# Altium PCB CH569W-R0-1v0.PcbDoc (part 2 of 4)
Units mil, origin at the board's own origin, x right, y up, seen from the top; angles counter-clockwise.
Board outline 3674 x 3156.46 mil, 4 copper layers (Top Layer, Mid-Layer 1, Mid-Layer 2, Bottom Layer); 78 components, 99 nets, 392 pads, 683 vias.
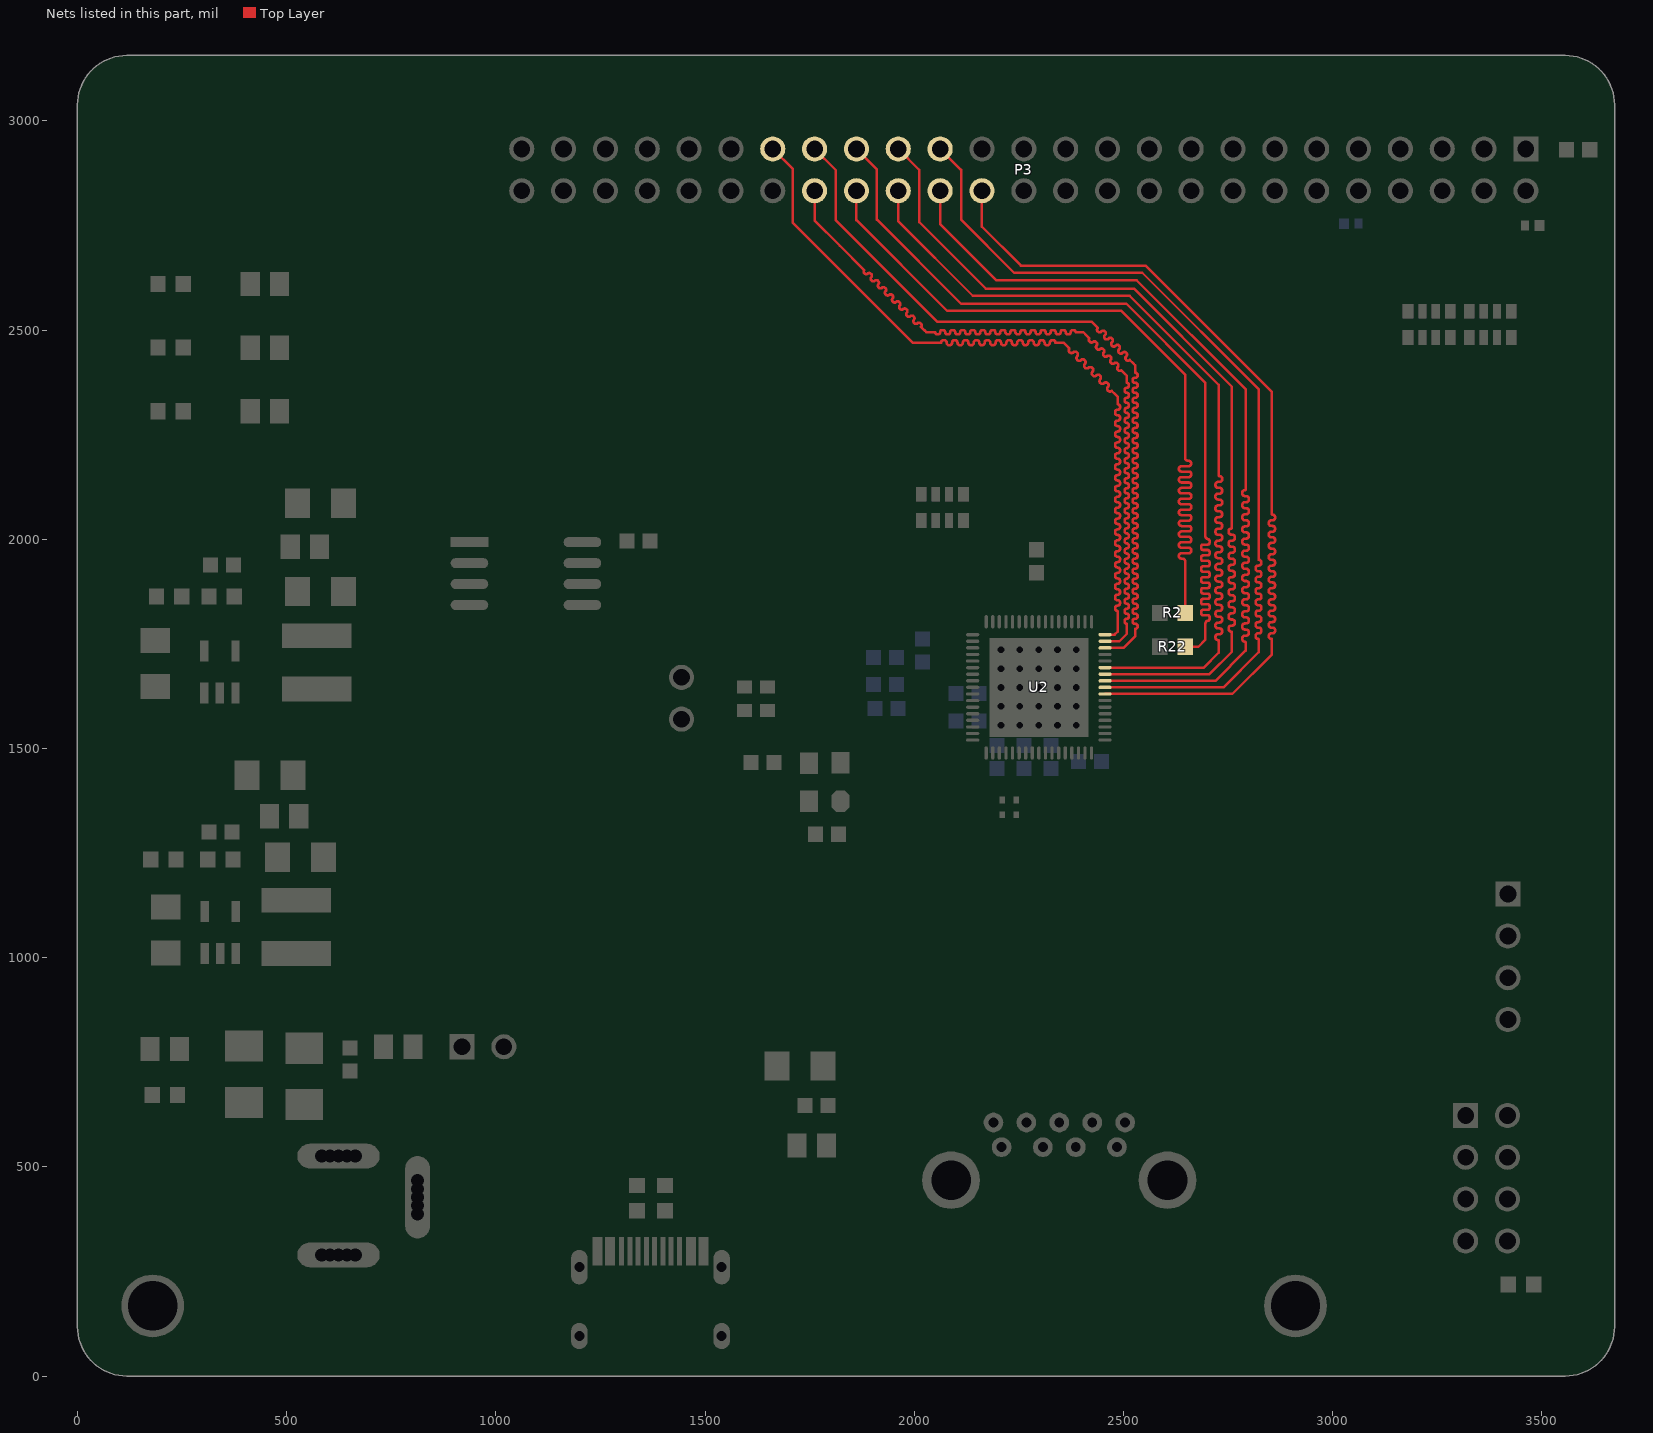
[diagram p4: the nets of this part, all layers, seen from the top]

## Via types
v1: diameter 17.72, hole 7.87, Top Layer to Bottom Layer, tented both sides, 350 vias
v2: diameter 28, hole 15, Top Layer to Bottom Layer, tented both sides, 141 vias
v3: diameter 28, hole 16, Top Layer to Bottom Layer, tented both sides, 104 vias
v4: diameter 24, hole 12, Top Layer to Bottom Layer, tented both sides, 85 vias
v5: diameter 30, hole 18, Top Layer to Bottom Layer, tented both sides, 3 vias

## Nets (pads, with @x,y where several pads share a name; then routed paths per layer and width w, separated by ;. In a path a pad name is that pad's centre, name@x,y a point inside that pad or via, vN(x,y) a via of type N, cw(c..) or ccw(c..) an arc to the next point about the centre after c; other vN are vias at no path point) (continued)
HD9: P3.28 U2.25 | length 2221.7
  Top Layer w6: P3.28@2162,2833 2162,2747 2255,2654 2553,2654 2855,2352 2855,2060.18 ccw(c2856.43,2060.18) 2856.43,2058.75 cw(c2856.43,2052.68) 2862.5,2052.68 2862.5,2051.32 cw(c2856.43,2051.32) 2856.43,2045.25 2855,2045.25 2853.57,2045.25 ccw(c2853.57,2039.18) 2847.5,2039.18 2847.5,2037.82 ccw(c2853.57,2037.82) 2853.57,2031.75 2855,2031.75 2856.43,2031.75 cw(c2856.43,2025.68) 2862.5,2025.68 2862.5,2024.32 cw(c2856.43,2024.32) 2856.43,2018.25 2855,2018.25 2853.57,2018.25 ccw(c2853.57,2012.18) 2847.5,2012.18 2847.5,2010.82 ccw(c2853.57,2010.82) 2853.57,2004.75 2855,2004.75 2856.43,2004.75 cw(c2856.43,1998.68) 2862.5,1998.68 2862.5,1997.32 cw(c2856.43,1997.32) 2856.43,1991.25 2855,1991.25 2853.57,1991.25 ccw(c2853.57,1985.18) 2847.5,1985.18 2847.5,1983.82 ccw(c2853.57,1983.82) 2853.57,1977.75 2855,1977.75 2856.43,1977.75 cw(c2856.43,1971.68) 2862.5,1971.68 2862.5,1970.32 cw(c2856.43,1970.32) 2856.43,1964.25 2855,1964.25 2853.57,1964.25 ccw(c2853.57,1958.18) 2847.5,1958.18 2847.5,1956.82 ccw(c2853.57,1956.82) 2853.57,1950.75 2855,1950.75 2856.43,1950.75 cw(c2856.43,1944.68) 2862.5,1944.68 2862.5,1943.32 cw(c2856.43,1943.32) 2856.43,1937.25 2855,1937.25 2853.57,1937.25 ccw(c2853.57,1931.18) 2847.5,1931.18 2847.5,1929.82 ccw(c2853.57,1929.82) 2853.57,1923.75 2855,1923.75 2856.43,1923.75 cw(c2856.43,1917.68) 2862.5,1917.68 2862.5,1916.32 cw(c2856.43,1916.32) 2856.43,1910.25 2855,1910.25 2853.57,1910.25 ccw(c2853.57,1904.18) 2847.5,1904.18 2847.5,1902.82 ccw(c2853.57,1902.82) 2853.57,1896.75 2855,1896.75 2856.43,1896.75 cw(c2856.43,1890.68) 2862.5,1890.68 2862.5,1889.32 cw(c2856.43,1889.32) 2856.43,1883.25 2855,1883.25 2853.57,1883.25 ccw(c2853.57,1877.18) 2847.5,1877.18 2847.5,1875.82 ccw(c2853.57,1875.82) 2853.57,1869.75 2855,1869.75 2856.43,1869.75 cw(c2856.43,1863.68) 2862.5,1863.68 2862.5,1862.32 cw(c2856.43,1862.32) 2856.43,1856.25 2855,1856.25 2853.57,1856.25 ccw(c2853.57,1850.18) 2847.5,1850.18 2847.5,1848.82 ccw(c2853.57,1848.82) 2853.57,1842.75 2855,1842.75 2856.43,1842.75 cw(c2856.43,1836.68) 2862.5,1836.68 2862.5,1835.32 cw(c2856.43,1835.32) 2856.43,1829.25 2855,1829.25 2853.57,1829.25 ccw(c2853.57,1823.18) 2847.5,1823.18 2847.5,1821.82 ccw(c2853.57,1821.82) 2853.57,1815.75 2855,1815.75 2856.43,1815.75 cw(c2856.43,1809.68) 2862.5,1809.68 2862.5,1808.32 cw(c2856.43,1808.32) 2856.43,1802.25 2855,1802.25 2853.57,1802.25 ccw(c2853.57,1796.18) 2847.5,1796.18 2847.5,1794.82 ccw(c2853.57,1794.82) 2853.57,1788.75 2855,1788.75 2856.43,1788.75 cw(c2856.43,1782.68) 2862.5,1782.68 2862.5,1781.32 cw(c2856.43,1781.32) 2856.43,1775.25 2855,1775.25 2853.57,1775.25 ccw(c2853.57,1769.18) 2847.5,1769.18 2847.5,1767.82 ccw(c2853.57,1767.82) 2853.57,1761.75 cw(c2853.57,1760.32) 2855,1760.32 2855,1755 2855,1725 2760.25,1630.25 U2.25@2456.18,1630.25
HD10: P3.29 U2.26 | length 2221.3
  Top Layer w6: P3.29@2062,2933 2112,2883 2112,2764 2239,2637 2545,2637 2823,2359 2823,2334 2823,1951.68 ccw(c2823.93,1951.68) 2823.93,1950.75 cw(c2823.93,1944.68) 2830,1944.68 2830,1943.32 cw(c2823.93,1943.32) 2823.93,1937.25 2823,1937.25 2822.07,1937.25 ccw(c2822.07,1931.18) 2816,1931.18 2816,1929.82 ccw(c2822.07,1929.82) 2822.07,1923.75 2823,1923.75 2823.93,1923.75 cw(c2823.93,1917.68) 2830,1917.68 2830,1916.32 cw(c2823.93,1916.32) 2823.93,1910.25 2823,1910.25 2822.07,1910.25 ccw(c2822.07,1904.18) 2816,1904.18 2816,1902.82 ccw(c2822.07,1902.82) 2822.07,1896.75 2823,1896.75 2823.93,1896.75 cw(c2823.93,1890.68) 2830,1890.68 2830,1889.32 cw(c2823.93,1889.32) 2823.93,1883.25 2823,1883.25 2822.07,1883.25 ccw(c2822.07,1877.18) 2816,1877.18 2816,1875.82 ccw(c2822.07,1875.82) 2822.07,1869.75 2823,1869.75 2823.93,1869.75 cw(c2823.93,1863.68) 2830,1863.68 2830,1862.32 cw(c2823.93,1862.32) 2823.93,1856.25 2823,1856.25 2822.07,1856.25 ccw(c2822.07,1850.18) 2816,1850.18 2816,1848.82 ccw(c2822.07,1848.82) 2822.07,1842.75 2823,1842.75 2823.93,1842.75 cw(c2823.93,1836.68) 2830,1836.68 2830,1835.32 cw(c2823.93,1835.32) 2823.93,1829.25 2823,1829.25 2822.07,1829.25 ccw(c2822.07,1823.18) 2816,1823.18 2816,1821.82 ccw(c2822.07,1821.82) 2822.07,1815.75 2823,1815.75 2823.93,1815.75 cw(c2823.93,1809.68) 2830,1809.68 2830,1808.32 cw(c2823.93,1808.32) 2823.93,1802.25 2823,1802.25 2822.07,1802.25 ccw(c2822.07,1796.18) 2816,1796.18 2816,1794.82 ccw(c2822.07,1794.82) 2822.07,1788.75 2823,1788.75 2823.93,1788.75 cw(c2823.93,1782.68) 2830,1782.68 2830,1781.32 cw(c2823.93,1781.32) 2823.93,1775.25 2823,1775.25 2822.07,1775.25 ccw(c2822.07,1769.18) 2816,1769.18 2816,1767.82 ccw(c2822.07,1767.82) 2822.07,1761.75 cw(c2822.07,1760.82) 2823,1760.82 2823,1755 2823,1730 2739,1646 U2.26@2456.18,1646
HD11: P3.30 U2.27 | length 2222.1
  Top Layer w6: P3.30@2062,2833 2062,2754 2197,2619 2532,2619 2792,2359 2792,2119.22 cw(c2790.52,2119.22) 2790.52,2117.75 ccw(c2790.52,2111.22) 2784,2111.22 2784,2109.78 ccw(c2790.52,2109.78) 2790.52,2103.25 2792,2103.25 2793.48,2103.25 cw(c2793.48,2096.72) 2800,2096.72 2800,2095.28 cw(c2793.48,2095.28) 2793.48,2088.75 2792,2088.75 2790.52,2088.75 ccw(c2790.52,2082.22) 2784,2082.22 2784,2080.78 ccw(c2790.52,2080.78) 2790.52,2074.25 2792,2074.25 2793.48,2074.25 cw(c2793.48,2067.72) 2800,2067.72 2800,2066.28 cw(c2793.48,2066.28) 2793.48,2059.75 2792,2059.75 2790.52,2059.75 ccw(c2790.52,2053.22) 2784,2053.22 2784,2051.78 ccw(c2790.52,2051.78) 2790.52,2045.25 2792,2045.25 2793.48,2045.25 cw(c2793.48,2038.72) 2800,2038.72 2800,2037.28 cw(c2793.48,2037.28) 2793.48,2030.75 2792,2030.75 2790.52,2030.75 ccw(c2790.52,2024.22) 2784,2024.22 2784,2022.78 ccw(c2790.52,2022.78) 2790.52,2016.25 2792,2016.25 2793.48,2016.25 cw(c2793.48,2009.72) 2800,2009.72 2800,2008.28 cw(c2793.48,2008.28) 2793.48,2001.75 2792,2001.75 2790.52,2001.75 ccw(c2790.52,1995.22) 2784,1995.22 2784,1993.78 ccw(c2790.52,1993.78) 2790.52,1987.25 2792,1987.25 2793.48,1987.25 cw(c2793.48,1980.72) 2800,1980.72 2800,1979.28 cw(c2793.48,1979.28) 2793.48,1972.75 2792,1972.75 2790.52,1972.75 ccw(c2790.52,1966.22) 2784,1966.22 2784,1964.78 ccw(c2790.52,1964.78) 2790.52,1958.25 2792,1958.25 2793.48,1958.25 cw(c2793.48,1951.72) 2800,1951.72 2800,1950.28 cw(c2793.48,1950.28) 2793.48,1943.75 2792,1943.75 2790.52,1943.75 ccw(c2790.52,1937.22) 2784,1937.22 2784,1935.78 ccw(c2790.52,1935.78) 2790.52,1929.25 2792,1929.25 2793.48,1929.25 cw(c2793.48,1922.72) 2800,1922.72 2800,1921.28 cw(c2793.48,1921.28) 2793.48,1914.75 2792,1914.75 2790.52,1914.75 ccw(c2790.52,1908.22) 2784,1908.22 2784,1906.78 ccw(c2790.52,1906.78) 2790.52,1900.25 2792,1900.25 2793.48,1900.25 cw(c2793.48,1893.72) 2800,1893.72 2800,1892.28 cw(c2793.48,1892.28) 2793.48,1885.75 2792,1885.75 2790.52,1885.75 ccw(c2790.52,1879.22) 2784,1879.22 2784,1877.78 ccw(c2790.52,1877.78) 2790.52,1871.25 2792,1871.25 2793.48,1871.25 cw(c2793.48,1864.72) 2800,1864.72 2800,1863.28 cw(c2793.48,1863.28) 2793.48,1856.75 2792,1856.75 2790.52,1856.75 ccw(c2790.52,1850.22) 2784,1850.22 2784,1848.78 ccw(c2790.52,1848.78) 2790.52,1842.25 2792,1842.25 2793.48,1842.25 cw(c2793.48,1835.72) 2800,1835.72 2800,1834.28 cw(c2793.48,1834.28) 2793.48,1827.75 2792,1827.75 2790.52,1827.75 ccw(c2790.52,1821.22) 2784,1821.22 2784,1819.78 ccw(c2790.52,1819.78) 2790.52,1813.25 2792,1813.25 2793.48,1813.25 cw(c2793.48,1806.72) 2800,1806.72 2800,1805.28 cw(c2793.48,1805.28) 2793.48,1798.75 2792,1798.75 2790.52,1798.75 ccw(c2790.52,1792.22) 2784,1792.22 2784,1790.78 ccw(c2790.52,1790.78) 2790.52,1784.25 2792,1784.25 2793.48,1784.25 cw(c2793.48,1777.72) 2800,1777.72 2800,1776.28 cw(c2793.48,1776.28) 2793.48,1769.75 2792,1769.75 2790.52,1769.75 ccw(c2790.52,1763.22) 2784,1763.22 2784,1761.78 ccw(c2790.52,1761.78) 2790.52,1755.25 cw(c2790.52,1753.78) 2792,1753.78 2792,1748 2792,1734 2719.75,1661.75 U2.27@2456.18,1661.75
HD12: P3.31 U2.28 | length 2223.4
  Top Layer w6: P3.31@1962,2933 2012,2883 2012,2758 2171,2599 2525,2599 2759,2365 2759,2350 2759,2026.72 cw(c2758.02,2026.72) 2758.02,2025.75 ccw(c2758.02,2019.22) 2751.5,2019.22 2751.5,2017.78 ccw(c2758.02,2017.78) 2758.02,2011.25 2759,2011.25 2759.98,2011.25 cw(c2759.98,2004.72) 2766.5,2004.72 2766.5,2003.28 cw(c2759.98,2003.28) 2759.98,1996.75 2759,1996.75 2758.02,1996.75 ccw(c2758.02,1990.22) 2751.5,1990.22 2751.5,1988.78 ccw(c2758.02,1988.78) 2758.02,1982.25 2759,1982.25 2759.98,1982.25 cw(c2759.98,1975.72) 2766.5,1975.72 2766.5,1974.28 cw(c2759.98,1974.28) 2759.98,1967.75 2759,1967.75 2758.02,1967.75 ccw(c2758.02,1961.22) 2751.5,1961.22 2751.5,1959.78 ccw(c2758.02,1959.78) 2758.02,1953.25 2759,1953.25 2759.98,1953.25 cw(c2759.98,1946.72) 2766.5,1946.72 2766.5,1945.28 cw(c2759.98,1945.28) 2759.98,1938.75 2759,1938.75 2758.02,1938.75 ccw(c2758.02,1932.22) 2751.5,1932.22 2751.5,1930.78 ccw(c2758.02,1930.78) 2758.02,1924.25 2759,1924.25 2759.98,1924.25 cw(c2759.98,1917.72) 2766.5,1917.72 2766.5,1916.28 cw(c2759.98,1916.28) 2759.98,1909.75 2759,1909.75 2758.02,1909.75 ccw(c2758.02,1903.22) 2751.5,1903.22 2751.5,1901.78 ccw(c2758.02,1901.78) 2758.02,1895.25 2759,1895.25 2759.98,1895.25 cw(c2759.98,1888.72) 2766.5,1888.72 2766.5,1887.28 cw(c2759.98,1887.28) 2759.98,1880.75 2759,1880.75 2758.02,1880.75 ccw(c2758.02,1874.22) 2751.5,1874.22 2751.5,1872.78 ccw(c2758.02,1872.78) 2758.02,1866.25 2759,1866.25 2759.98,1866.25 cw(c2759.98,1859.72) 2766.5,1859.72 2766.5,1858.28 cw(c2759.98,1858.28) 2759.98,1851.75 2759,1851.75 2758.02,1851.75 ccw(c2758.02,1845.22) 2751.5,1845.22 2751.5,1843.78 ccw(c2758.02,1843.78) 2758.02,1837.25 2759,1837.25 2759.98,1837.25 cw(c2759.98,1830.72) 2766.5,1830.72 2766.5,1829.28 cw(c2759.98,1829.28) 2759.98,1822.75 2759,1822.75 2758.02,1822.75 ccw(c2758.02,1816.22) 2751.5,1816.22 2751.5,1814.78 ccw(c2758.02,1814.78) 2758.02,1808.25 2759,1808.25 2759.98,1808.25 cw(c2759.98,1801.72) 2766.5,1801.72 2766.5,1800.28 cw(c2759.98,1800.28) 2759.98,1793.75 2759,1793.75 2758.02,1793.75 ccw(c2758.02,1787.22) 2751.5,1787.22 2751.5,1785.78 ccw(c2758.02,1785.78) 2758.02,1779.25 cw(c2758.02,1778.28) 2759,1778.28 2759,1772 2759,1731 2705.5,1677.5 U2.28@2456.18,1677.5
HD13: P3.32 U2.29 | length 2222.7
  Top Layer w6: P3.32@1962,2833 1962,2760 2140,2582 2515,2582 2728,2369 2728,2351 2728,2152.7 ccw(c2729.7,2152.7) 2729.7,2151 cw(c2729.7,2144.7) 2736,2144.7 2736,2143.3 cw(c2729.7,2143.3) 2729.7,2137 2728,2137 2726.3,2137 ccw(c2726.3,2130.7) 2720,2130.7 2720,2129.3 ccw(c2726.3,2129.3) 2726.3,2123 2728,2123 2729.7,2123 cw(c2729.7,2116.7) 2736,2116.7 2736,2115.3 cw(c2729.7,2115.3) 2729.7,2109 2728,2109 2726.3,2109 ccw(c2726.3,2102.7) 2720,2102.7 2720,2101.3 ccw(c2726.3,2101.3) 2726.3,2095 2728,2095 2729.7,2095 cw(c2729.7,2088.7) 2736,2088.7 2736,2087.3 cw(c2729.7,2087.3) 2729.7,2081 2728,2081 2726.3,2081 ccw(c2726.3,2074.7) 2720,2074.7 2720,2073.3 ccw(c2726.3,2073.3) 2726.3,2067 2728,2067 2729.7,2067 cw(c2729.7,2060.7) 2736,2060.7 2736,2059.3 cw(c2729.7,2059.3) 2729.7,2053 2728,2053 2726.3,2053 ccw(c2726.3,2046.7) 2720,2046.7 2720,2045.3 ccw(c2726.3,2045.3) 2726.3,2039 2728,2039 2729.7,2039 cw(c2729.7,2032.7) 2736,2032.7 2736,2031.3 cw(c2729.7,2031.3) 2729.7,2025 2728,2025 2726.3,2025 ccw(c2726.3,2018.7) 2720,2018.7 2720,2017.3 ccw(c2726.3,2017.3) 2726.3,2011 2728,2011 2729.7,2011 cw(c2729.7,2004.7) 2736,2004.7 2736,2003.3 cw(c2729.7,2003.3) 2729.7,1997 2728,1997 2726.3,1997 ccw(c2726.3,1990.7) 2720,1990.7 2720,1989.3 ccw(c2726.3,1989.3) 2726.3,1983 2728,1983 2729.7,1983 cw(c2729.7,1976.7) 2736,1976.7 2736,1975.3 cw(c2729.7,1975.3) 2729.7,1969 2728,1969 2726.3,1969 ccw(c2726.3,1962.7) 2720,1962.7 2720,1961.3 ccw(c2726.3,1961.3) 2726.3,1955 2728,1955 2729.7,1955 cw(c2729.7,1948.7) 2736,1948.7 2736,1947.3 cw(c2729.7,1947.3) 2729.7,1941 2728,1941 2726.3,1941 ccw(c2726.3,1934.7) 2720,1934.7 2720,1933.3 ccw(c2726.3,1933.3) 2726.3,1927 2728,1927 2729.7,1927 cw(c2729.7,1920.7) 2736,1920.7 2736,1919.3 cw(c2729.7,1919.3) 2729.7,1913 2728,1913 2726.3,1913 ccw(c2726.3,1906.7) 2720,1906.7 2720,1905.3 ccw(c2726.3,1905.3) 2726.3,1899 2728,1899 2729.7,1899 cw(c2729.7,1892.7) 2736,1892.7 2736,1891.3 cw(c2729.7,1891.3) 2729.7,1885 2728,1885 2726.3,1885 ccw(c2726.3,1878.7) 2720,1878.7 2720,1877.3 ccw(c2726.3,1877.3) 2726.3,1871 2728,1871 2729.7,1871 cw(c2729.7,1864.7) 2736,1864.7 2736,1863.3 cw(c2729.7,1863.3) 2729.7,1857 2728,1857 2726.3,1857 ccw(c2726.3,1850.7) 2720,1850.7 2720,1849.3 ccw(c2726.3,1849.3) 2726.3,1843 2728,1843 2729.7,1843 cw(c2729.7,1836.7) 2736,1836.7 2736,1835.3 cw(c2729.7,1835.3) 2729.7,1829 2728,1829 2726.3,1829 ccw(c2726.3,1822.7) 2720,1822.7 2720,1821.3 ccw(c2726.3,1821.3) 2726.3,1815 2728,1815 2729.7,1815 cw(c2729.7,1808.7) 2736,1808.7 2736,1807.3 cw(c2729.7,1807.3) 2729.7,1801 2728,1801 2726.3,1801 ccw(c2726.3,1794.7) 2720,1794.7 2720,1793.3 ccw(c2726.3,1793.3) 2726.3,1787 2728,1787 2729.7,1787 cw(c2729.7,1780.7) 2736,1780.7 2736,1779.3 cw(c2729.7,1779.3) 2729.7,1773 2728,1773 2726.3,1773 ccw(c2726.3,1766.7) 2720,1766.7 2720,1765.3 ccw(c2726.3,1765.3) 2726.3,1759 cw(c2726.3,1757.3) 2728,1757.3 2728,1752 2728,1729 2692.24,1693.24 U2.29@2456.18,1693.24
HD14: P3.33 R22.2 | length 2040.7
  Top Layer w6: P3.33@1862,2933 1911,2884 1911,2764 2112,2563 2507,2563 2696,2374 2696,2216 2696,2009.34 2696,2006.34 ccw(c2703.63,2007.8) 2701.45,2000.34 cw(c2701.45,1995.79) 2706,1995.79 2706,1991.89 cw(c2701.45,1991.89) 2701.45,1987.34 2690.55,1987.34 ccw(c2690.55,1982.79) 2686,1982.79 2686,1978.89 ccw(c2690.55,1978.89) 2690.55,1974.34 2701.45,1974.34 cw(c2701.45,1969.79) 2706,1969.79 2706,1965.89 cw(c2701.45,1965.89) 2701.45,1961.34 2690.55,1961.34 ccw(c2690.55,1956.79) 2686,1956.79 2686,1952.89 ccw(c2690.55,1952.89) 2690.55,1948.34 2701.45,1948.34 cw(c2701.45,1943.79) 2706,1943.79 2706,1939.89 cw(c2701.45,1939.89) 2701.45,1935.34 2690.55,1935.34 ccw(c2690.55,1930.79) 2686,1930.79 2686,1926.89 ccw(c2690.55,1926.89) 2690.55,1922.34 2701.45,1922.34 cw(c2701.45,1917.79) 2706,1917.79 2706,1913.89 cw(c2701.45,1913.89) 2701.45,1909.34 2690.55,1909.34 ccw(c2690.55,1904.79) 2686,1904.79 2686,1900.89 ccw(c2690.55,1900.89) 2690.55,1896.34 2701.45,1896.34 cw(c2701.45,1891.79) 2706,1891.79 2706,1887.89 cw(c2701.45,1887.89) 2701.45,1883.34 2690.55,1883.34 ccw(c2690.55,1878.79) 2686,1878.79 2686,1874.89 ccw(c2690.55,1874.89) 2690.55,1870.34 2701.45,1870.34 cw(c2701.45,1865.79) 2706,1865.79 2706,1861.89 cw(c2701.45,1861.89) 2701.45,1857.34 2690.55,1857.34 ccw(c2690.55,1852.79) 2686,1852.79 2686,1848.89 ccw(c2690.55,1848.89) 2690.55,1844.34 2701.45,1844.34 cw(c2701.45,1839.79) 2706,1839.79 2706,1835.89 cw(c2701.45,1835.89) 2701.45,1831.34 2690.55,1831.34 ccw(c2690.55,1826.79) 2686,1826.79 2686,1822.89 ccw(c2690.55,1822.89) 2690.55,1818.34 2701.45,1818.34 cw(c2701.45,1813.79) 2706,1813.79 2706,1809.89 cw(c2701.45,1809.89) 2701.45,1805.34 ccw(c2703.77,1797.93) 2696,1797.93 2696,1779.36 2696,1760 2679,1743 R22.2@2647.63,1743
HD15: P3.34 R2.2 | length 2010.8
  Top Layer w6: P3.34@1862,2833 1862,2763 2079,2546 2495,2546 2647.63,2393.37 2647.63,2297.82 2647.63,2194.2 ccw(c2654.13,2194.2) 2654.13,2187.7 2655.49,2187.7 cw(c2655.49,2181.2) 2655.49,2174.7 2639.13,2174.7 ccw(c2639.13,2168.2) 2639.13,2161.7 2656.13,2161.7 cw(c2656.13,2155.2) 2656.13,2148.7 2639.13,2148.7 ccw(c2639.13,2142.2) 2639.13,2135.7 2656.13,2135.7 cw(c2656.13,2129.2) 2656.13,2122.7 2639.13,2122.7 ccw(c2639.13,2116.2) 2639.13,2109.7 2656.13,2109.7 cw(c2656.13,2103.2) 2656.13,2096.7 2639.13,2096.7 ccw(c2639.13,2090.2) 2639.13,2083.7 2656.13,2083.7 cw(c2656.13,2077.2) 2656.13,2070.7 2639.13,2070.7 ccw(c2639.13,2064.2) 2639.13,2057.7 2656.13,2057.7 cw(c2656.13,2051.2) 2656.13,2044.7 2639.13,2044.7 ccw(c2639.13,2038.2) 2639.13,2031.7 2656.13,2031.7 cw(c2656.13,2025.2) 2656.13,2018.7 2639.13,2018.7 ccw(c2639.13,2012.2) 2639.13,2005.7 2656.13,2005.7 cw(c2656.13,1999.2) 2656.13,1992.7 2639.13,1992.7 ccw(c2639.13,1986.2) 2639.13,1979.7 2656.13,1979.7 cw(c2656.13,1973.2) 2656.13,1966.7 2639.13,1966.7 ccw(c2639.13,1960.2) 2639.13,1953.7 2641.13,1953.7 cw(c2641.13,1947.2) 2647.63,1947.2 2647.63,1944.2 R2.2@2647.63,1824
HD16: P3.35 U2.32 | length 2223.5
  Top Layer w6: P3.35@1762,2933 1813,2882 1813,2762 2055,2520 2424,2520 2436.5,2507.5 2438.9,2505.1 2438.48,2504.67 ccw(c2442.3,2500.85) 2438.48,2497.03 2439.33,2496.19 ccw(c2443.15,2500) 2446.97,2496.19 2447.39,2496.61 2447.81,2497.03 cw(c2451.63,2493.22) 2455.45,2497.03 2456.3,2496.19 cw(c2452.48,2492.37) 2456.3,2488.55 2455.88,2488.12 2455.45,2487.7 ccw(c2459.27,2483.88) 2455.45,2480.06 2456.3,2479.22 ccw(c2460.12,2483.03) 2463.94,2479.22 2464.36,2479.64 2464.78,2480.06 cw(c2468.6,2476.25) 2472.42,2480.06 2473.27,2479.22 cw(c2469.45,2475.4) 2473.27,2471.58 2472.85,2471.15 2472.42,2470.73 ccw(c2476.24,2466.91) 2472.42,2463.09 2473.27,2462.24 ccw(c2477.09,2466.06) 2480.91,2462.24 2481.33,2462.67 2481.76,2463.09 cw(c2485.57,2459.27) 2489.39,2463.09 2490.24,2462.24 cw(c2486.42,2458.43) 2490.24,2454.61 2489.82,2454.18 2489.39,2453.76 ccw(c2493.21,2449.94) 2489.39,2446.12 2490.24,2445.27 ccw(c2494.06,2449.09) 2497.88,2445.27 2498.3,2445.7 2498.73,2446.12 cw(c2502.54,2442.3) 2506.36,2446.12 2507.21,2445.27 cw(c2503.39,2441.46) 2507.21,2437.64 2506.79,2437.21 2506.36,2436.79 ccw(c2510.18,2432.97) 2506.36,2429.15 2507.21,2428.3 ccw(c2511.03,2432.12) 2514.85,2428.3 2515.27,2428.73 2523.76,2420.24 2528,2416 2528,2410 2528,2398 2528.6,2398 cw(c2528.6,2392.6) 2534,2392.6 2534,2391.4 cw(c2528.6,2391.4) 2528.6,2386 2528,2386 2527.4,2386 ccw(c2527.4,2380.6) 2522,2380.6 2522,2379.4 ccw(c2527.4,2379.4) 2527.4,2374 2528,2374 2528.6,2374 cw(c2528.6,2368.6) 2534,2368.6 2534,2367.4 cw(c2528.6,2367.4) 2528.6,2362 2528,2362 2527.4,2362 ccw(c2527.4,2356.6) 2522,2356.6 2522,2355.4 ccw(c2527.4,2355.4) 2527.4,2350 2528,2350 2528.6,2350 cw(c2528.6,2344.6) 2534,2344.6 2534,2343.4 cw(c2528.6,2343.4) 2528.6,2338 2528,2338 2527.4,2338 ccw(c2527.4,2332.6) 2522,2332.6 2522,2331.4 ccw(c2527.4,2331.4) 2527.4,2326 2528,2326 2528.6,2326 cw(c2528.6,2320.6) 2534,2320.6 2534,2319.4 cw(c2528.6,2319.4) 2528.6,2314 2528,2314 2527.4,2314 ccw(c2527.4,2308.6) 2522,2308.6 2522,2307.4 ccw(c2527.4,2307.4) 2527.4,2302 2528,2302 2528.6,2302 cw(c2528.6,2296.6) 2534,2296.6 2534,2295.4 cw(c2528.6,2295.4) 2528.6,2290 2528,2290 2527.4,2290 ccw(c2527.4,2284.6) 2522,2284.6 2522,2283.4 ccw(c2527.4,2283.4) 2527.4,2278 2528,2278 2528.6,2278 cw(c2528.6,2272.6) 2534,2272.6 2534,2271.4 cw(c2528.6,2271.4) 2528.6,2266 2528,2266 2527.4,2266 ccw(c2527.4,2260.6) 2522,2260.6 2522,2259.4 ccw(c2527.4,2259.4) 2527.4,2254 2528,2254 2528.6,2254 cw(c2528.6,2248.6) 2534,2248.6 2534,2247.4 cw(c2528.6,2247.4) 2528.6,2242 2528,2242 2527.4,2242 ccw(c2527.4,2236.6) 2522,2236.6 2522,2235.4 ccw(c2527.4,2235.4) 2527.4,2230 2528,2230 2528.6,2230 cw(c2528.6,2224.6) 2534,2224.6 2534,2223.4 cw(c2528.6,2223.4) 2528.6,2218 2528,2218 2527.4,2218 ccw(c2527.4,2212.6) 2522,2212.6 2522,2211.4 ccw(c2527.4,2211.4) 2527.4,2206 2528,2206 2528.6,2206 cw(c2528.6,2200.6) 2534,2200.6 2534,2199.4 cw(c2528.6,2199.4) 2528.6,2194 2528,2194 2527.4,2194 ccw(c2527.4,2188.6) 2522,2188.6 2522,2187.4 ccw(c2527.4,2187.4) 2527.4,2182 2528,2182 2528.6,2182 cw(c2528.6,2176.6) 2534,2176.6 2534,2175.4 cw(c2528.6,2175.4) 2528.6,2170 2528,2170 2527.4,2170 ccw(c2527.4,2164.6) 2522,2164.6 2522,2163.4 ccw(c2527.4,2163.4) 2527.4,2158 2528,2158 2528.6,2158 cw(c2528.6,2152.6) 2534,2152.6 2534,2151.4 cw(c2528.6,2151.4) 2528.6,2146 2528,2146 2527.4,2146 ccw(c2527.4,2140.6) 2522,2140.6 2522,2139.4 ccw(c2527.4,2139.4) 2527.4,2134 2528,2134 2528.6,2134 cw(c2528.6,2128.6) 2534,2128.6 2534,2127.4 cw(c2528.6,2127.4) 2528.6,2122 2528,2122 2527.4,2122 ccw(c2527.4,2116.6) 2522,2116.6 2522,2115.4 ccw(c2527.4,2115.4) 2527.4,2110 2528,2110 2528.6,2110 cw(c2528.6,2104.6) 2534,2104.6 2534,2103.4 cw(c2528.6,2103.4) 2528.6,2098 2528,2098 2527.4,2098 ccw(c2527.4,2092.6) 2522,2092.6 2522,2091.4 ccw(c2527.4,2091.4) 2527.4,2086 2528,2086 2528.6,2086 cw(c2528.6,2080.6) 2534,2080.6 2534,2079.4 cw(c2528.6,2079.4) 2528.6,2074 2528,2074 2527.4,2074 ccw(c2527.4,2068.6) 2522,2068.6 2522,2067.4 ccw(c2527.4,2067.4) 2527.4,2062 2528,2062 2528.6,2062 cw(c2528.6,2056.6) 2534,2056.6 2534,2055.4 cw(c2528.6,2055.4) 2528.6,2050 2528,2050 2527.4,2050 ccw(c2527.4,2044.6) 2522,2044.6 2522,2043.4 ccw(c2527.4,2043.4) 2527.4,2038 2528,2038 2528.6,2038 cw(c2528.6,2032.6) 2534,2032.6 2534,2031.4 cw(c2528.6,2031.4) 2528.6,2026 2528,2026 2527.4,2026 ccw(c2527.4,2020.6) 2522,2020.6 2522,2019.4 ccw(c2527.4,2019.4) 2527.4,2014 2528,2014 2528.6,2014 cw(c2528.6,2008.6) 2534,2008.6 2534,2007.4 cw(c2528.6,2007.4) 2528.6,2002 2528,2002 2527.4,2002 ccw(c2527.4,1996.6) 2522,1996.6 2522,1995.4 ccw(c2527.4,1995.4) 2527.4,1990 2528,1990 2528.6,1990 cw(c2528.6,1984.6) 2534,1984.6 2534,1983.4 cw(c2528.6,1983.4) 2528.6,1978 2528,1978 2527.4,1978 ccw(c2527.4,1972.6) 2522,1972.6 2522,1971.4 ccw(c2527.4,1971.4) 2527.4,1966 2528,1966 2528.6,1966 cw(c2528.6,1960.6) 2534,1960.6 2534,1959.4 cw(c2528.6,1959.4) 2528.6,1954 2528,1954 2527.4,1954 ccw(c2527.4,1948.6) 2522,1948.6 2522,1947.4 ccw(c2527.4,1947.4) 2527.4,1942 2528,1942 2528.6,1942 cw(c2528.6,1936.6) 2534,1936.6 2534,1935.4 cw(c2528.6,1935.4) 2528.6,1930 2528,1930 2527.4,1930 ccw(c2527.4,1924.6) 2522,1924.6 2522,1923.4 ccw(c2527.4,1923.4) 2527.4,1918 2528,1918 2528.6,1918 cw(c2528.6,1912.6) 2534,1912.6 2534,1911.4 cw(c2528.6,1911.4) 2528.6,1906 2528,1906 2527.4,1906 ccw(c2527.4,1900.6) 2522,1900.6 2522,1899.4 ccw(c2527.4,1899.4) 2527.4,1894 2528,1894 2528.6,1894 cw(c2528.6,1888.6) 2534,1888.6 2534,1887.4 cw(c2528.6,1887.4) 2528.6,1882 2528,1882 2527.4,1882 ccw(c2527.4,1876.6) 2522,1876.6 2522,1875.4 ccw(c2527.4,1875.4) 2527.4,1870 2528,1870 2528.6,1870 cw(c2528.6,1864.6) 2534,1864.6 2534,1863.4 cw(c2528.6,1863.4) 2528.6,1858 2528,1858 2527.4,1858 ccw(c2527.4,1852.6) 2522,1852.6 2522,1851.4 ccw(c2527.4,1851.4) 2527.4,1846 2528,1846 2528.6,1846 cw(c2528.6,1840.6) 2534,1840.6 2534,1839.4 cw(c2528.6,1839.4) 2528.6,1834 2528,1834 2527.4,1834 ccw(c2527.4,1828.6) 2522,1828.6 2522,1827.4 ccw(c2527.4,1827.4) 2527.4,1822 2528,1822 2528.6,1822 cw(c2528.6,1816.6) 2534,1816.6 2534,1815.4 cw(c2528.6,1815.4) 2528.6,1810 2528,1810 2527.4,1810 ccw(c2527.4,1804.6) 2522,1804.6 2522,1803.4 ccw(c2527.4,1803.4) 2527.4,1798 2528,1798 2528.6,1798 cw(c2528.6,1792.6) 2534,1792.6 2534,1791.4 cw(c2528.6,1791.4) 2528.6,1786 2528,1786 2528,1774 2528,1768 2500.49,1740.49 U2.32@2456.18,1740.49
HD17: P3.36 U2.33 | length 2223.4
  Top Layer w6: P3.36@1762,2833 1762,2762 1822,2702 1880.51,2643.49 ccw(c1884.04,2639.96) 1880.51,2636.42 1881.92,2635.01 ccw(c1885.46,2638.54) 1888.99,2635.01 cw(c1892.53,2631.47) 1896.06,2635.01 1897.48,2633.59 cw(c1893.94,2630.06) 1897.48,2626.52 ccw(c1901.01,2622.99) 1897.48,2619.45 1898.89,2618.04 ccw(c1902.43,2621.57) 1905.96,2618.04 cw(c1909.5,2614.5) 1913.03,2618.04 1914.45,2616.62 cw(c1910.91,2613.09) 1914.45,2609.55 ccw(c1917.98,2606.02) 1914.45,2602.48 1915.86,2601.07 ccw(c1919.4,2604.6) 1922.93,2601.07 cw(c1926.47,2597.53) 1930.01,2601.07 1931.42,2599.65 cw(c1927.88,2596.12) 1931.42,2592.58 ccw(c1934.95,2589.05) 1931.42,2585.51 1932.83,2584.1 ccw(c1936.37,2587.63) 1939.9,2584.1 cw(c1943.44,2580.56) 1946.98,2584.1 1948.39,2582.68 cw(c1944.85,2579.15) 1948.39,2575.61 ccw(c1951.93,2572.07) 1948.39,2568.54 1949.8,2567.12 ccw(c1953.34,2570.66) 1956.88,2567.12 cw(c1960.41,2563.59) 1963.95,2567.12 1965.36,2565.71 cw(c1961.82,2562.18) 1965.36,2558.64 ccw(c1968.9,2555.1) 1965.36,2551.57 1966.77,2550.15 ccw(c1970.31,2553.69) 1973.85,2550.15 cw(c1977.38,2546.62) 1980.92,2550.15 1982.33,2548.74 cw(c1978.8,2545.2) 1982.33,2541.67 ccw(c1985.87,2538.13) 1982.33,2534.6 1983.75,2533.18 ccw(c1987.28,2536.72) 1990.82,2533.18 cw(c1994.35,2529.65) 1997.89,2533.18 1999.3,2531.77 cw(c1995.77,2528.23) 1999.3,2524.7 ccw(c2002.84,2521.16) 1999.3,2517.63 2000.72,2516.21 ccw(c2004.25,2519.75) 2007.79,2516.21 cw(c2011.32,2512.68) 2014.86,2516.21 2016.27,2514.8 cw(c2012.74,2511.26) 2016.27,2507.73 2024.76,2499.24 2029,2495 2038,2495 2050,2495 ccw(c2055,2495) 2055,2490 2057,2490 ccw(c2057,2495) 2062,2495 cw(c2067,2495) 2067,2500 2069,2500 cw(c2069,2495) 2074,2495 ccw(c2079,2495) 2079,2490 2081,2490 ccw(c2081,2495) 2086,2495 cw(c2091,2495) 2091,2500 2093,2500 cw(c2093,2495) 2098,2495 ccw(c2103,2495) 2103,2490 2105,2490 ccw(c2105,2495) 2110,2495 cw(c2115,2495) 2115,2500 2117,2500 cw(c2117,2495) 2122,2495 ccw(c2127,2495) 2127,2490 2129,2490 ccw(c2129,2495) 2134,2495 cw(c2139,2495) 2139,2500 2141,2500 cw(c2141,2495) 2146,2495 ccw(c2151,2495) 2151,2490 2153,2490 ccw(c2153,2495) 2158,2495 cw(c2163,2495) 2163,2500 2165,2500 cw(c2165,2495) 2170,2495 ccw(c2175,2495) 2175,2490 2177,2490 ccw(c2177,2495) 2182,2495 cw(c2187,2495) 2187,2500 2189,2500 cw(c2189,2495) 2194,2495 ccw(c2199,2495) 2199,2490 2201,2490 ccw(c2201,2495) 2206,2495 cw(c2211,2495) 2211,2500 2213,2500 cw(c2213,2495) 2218,2495 ccw(c2223,2495) 2223,2490 2225,2490 ccw(c2225,2495) 2230,2495 cw(c2235,2495) 2235,2500 2237,2500 cw(c2237,2495) 2242,2495 ccw(c2247,2495) 2247,2490 2249,2490 ccw(c2249,2495) 2254,2495 cw(c2259,2495) 2259,2500 2261,2500 cw(c2261,2495) 2266,2495 ccw(c2271,2495) 2271,2490 2273,2490 ccw(c2273,2495) 2278,2495 cw(c2283,2495) 2283,2500 2285,2500 cw(c2285,2495) 2290,2495 ccw(c2295,2495) 2295,2490 2297,2490 ccw(c2297,2495) 2302,2495 cw(c2307,2495) 2307,2500 2309,2500 cw(c2309,2495) 2314,2495 ccw(c2319,2495) 2319,2490 2321,2490 ccw(c2321,2495) 2326,2495 cw(c2331,2495) 2331,2500 2333,2500 cw(c2333,2495) 2338,2495 ccw(c2343,2495) 2343,2490 2345,2490 ccw(c2345,2495) 2350,2495 cw(c2355,2495) 2355,2500 2357,2500 cw(c2357,2495) 2362,2495 ccw(c2367,2495) 2367,2490 2369,2490 ccw(c2369,2495) 2374,2495 cw(c2379,2495) 2379,2500 2381,2500 cw(c2381,2495) 2386,2495 2398,2495 2404,2495 2410.42,2488.58 2418.9,2480.1 ccw(c2422.44,2476.56) 2418.9,2473.02 2420.32,2471.61 ccw(c2423.85,2475.15) 2427.39,2471.61 cw(c2430.93,2468.07) 2434.46,2471.61 2435.88,2470.2 cw(c2432.34,2466.66) 2435.88,2463.12 ccw(c2439.41,2459.59) 2435.88,2456.05 2437.29,2454.64 ccw(c2440.82,2458.18) 2444.36,2454.64 cw(c2447.9,2451.1) 2451.43,2454.64 2452.85,2453.23 cw(c2449.31,2449.69) 2452.85,2446.15 ccw(c2456.38,2442.62) 2452.85,2439.08 2454.26,2437.67 ccw(c2457.8,2441.2) 2461.33,2437.67 cw(c2464.87,2434.13) 2468.4,2437.67 2469.82,2436.25 cw(c2466.28,2432.72) 2469.82,2429.18 ccw(c2473.35,2425.65) 2469.82,2422.11 2471.23,2420.7 ccw(c2474.77,2424.23) 2478.3,2420.7 cw(c2481.84,2417.16) 2485.37,2420.7 2486.79,2419.28 cw(c2483.25,2415.75) 2486.79,2412.21 ccw(c2490.32,2408.68) 2486.79,2405.14 2488.2,2403.73 ccw(c2491.74,2407.26) 2495.27,2403.73 2503.76,2395.24 2508,2391 2508,2386 2508,2374 cw(c2508,2369) 2513,2369 2513,2367 cw(c2508,2367) 2508,2362 ccw(c2508,2357) 2503,2357 2503,2355 ccw(c2508,2355) 2508,2350 cw(c2508,2345) 2513,2345 2513,2343 cw(c2508,2343) 2508,2338 ccw(c2508,2333) 2503,2333 2503,2331 ccw(c2508,2331) 2508,2326 cw(c2508,2321) 2513,2321 2513,2319 cw(c2508,2319) 2508,2314 ccw(c2508,2309) 2503,2309 2503,2307 ccw(c2508,2307) 2508,2302 cw(c2508,2297) 2513,2297 2513,2295 cw(c2508,2295) 2508,2290 ccw(c2508,2285) 2503,2285 2503,2283 ccw(c2508,2283) 2508,2278 cw(c2508,2273) 2513,2273 2513,2271 cw(c2508,2271) 2508,2266 ccw(c2508,2261) 2503,2261 2503,2259 ccw(c2508,2259) 2508,2254 cw(c2508,2249) 2513,2249 2513,2247 cw(c2508,2247) 2508,2242 ccw(c2508,2237) 2503,2237 2503,2235 ccw(c2508,2235) 2508,2230 cw(c2508,2225) 2513,2225 2513,2223 cw(c2508,2223) 2508,2218 ccw(c2508,2213) 2503,2213 2503,2211 ccw(c2508,2211) 2508,2206 cw(c2508,2201) 2513,2201 2513,2199 cw(c2508,2199) 2508,2194 ccw(c2508,2189) 2503,2189 2503,2187 ccw(c2508,2187) 2508,2182 cw(c2508,2177) 2513,2177 2513,2175 cw(c2508,2175) 2508,2170 ccw(c2508,2165) 2503,2165 2503,2163 ccw(c2508,2163) 2508,2158 cw(c2508,2153) 2513,2153 2513,2151 cw(c2508,2151) 2508,2146 ccw(c2508,2141) 2503,2141 2503,2139 ccw(c2508,2139) 2508,2134 cw(c2508,2129) 2513,2129 2513,2127 cw(c2508,2127) 2508,2122 ccw(c2508,2117) 2503,2117 2503,2115 ccw(c2508,2115) 2508,2110 cw(c2508,2105) 2513,2105 2513,2103 cw(c2508,2103) 2508,2098 ccw(c2508,2093) 2503,2093 2503,2091 ccw(c2508,2091) 2508,2086 cw(c2508,2081) 2513,2081 2513,2079 cw(c2508,2079) 2508,2074 ccw(c2508,2069) 2503,2069 2503,2067 ccw(c2508,2067) 2508,2062 cw(c2508,2057) 2513,2057 2513,2055 cw(c2508,2055) 2508,2050 ccw(c2508,2045) 2503,2045 2503,2043 ccw(c2508,2043) 2508,2038 cw(c2508,2033) 2513,2033 2513,2031 cw(c2508,2031) 2508,2026 ccw(c2508,2021) 2503,2021 2503,2019 ccw(c2508,2019) 2508,2014 cw(c2508,2009) 2513,2009 2513,2007 cw(c2508,2007) 2508,2002 ccw(c2508,1997) 2503,1997 2503,1995 ccw(c2508,1995) 2508,1990 cw(c2508,1985) 2513,1985 2513,1983 cw(c2508,1983) 2508,1978 ccw(c2508,1973) 2503,1973 2503,1971 ccw(c2508,1971) 2508,1966 cw(c2508,1961) 2513,1961 2513,1959 cw(c2508,1959) 2508,1954 ccw(c2508,1949) 2503,1949 2503,1947 ccw(c2508,1947) 2508,1942 cw(c2508,1937) 2513,1937 2513,1935 cw(c2508,1935) 2508,1930 ccw(c2508,1925) 2503,1925 2503,1923 ccw(c2508,1923) 2508,1918 cw(c2508,1913) 2513,1913 2513,1911 cw(c2508,1911) 2508,1906 ccw(c2508,1901) 2503,1901 2503,1899 ccw(c2508,1899) 2508,1894 cw(c2508,1889) 2513,1889 2513,1887 cw(c2508,1887) 2508,1882 ccw(c2508,1877) 2503,1877 2503,1875 ccw(c2508,1875) 2508,1870 cw(c2508,1865) 2513,1865 2513,1863 cw(c2508,1863) 2508,1858 ccw(c2508,1853) 2503,1853 2503,1851 ccw(c2508,1851) 2508,1846 cw(c2508,1841) 2513,1841 2513,1839 cw(c2508,1839) 2508,1834 ccw(c2508,1829) 2503,1829 2503,1827 ccw(c2508,1827) 2508,1822 cw(c2508,1817) 2513,1817 2513,1815 cw(c2508,1815) 2508,1810 ccw(c2508,1805) 2503,1805 2503,1803 ccw(c2508,1803) 2508,1798 2508,1792 2508,1774 2490.24,1756.24 U2.33@2456.18,1756.24
HD18: P3.37 U2.34 | length 2219
  Top Layer w6: P3.37@1662,2933 1710,2885 1710,2756 1996,2470 2062,2470 2064.5,2470 cw(c2070.5,2470) 2070.5,2476 2071.5,2476 cw(c2071.5,2470) 2077.5,2470 ccw(c2083.5,2470) 2083.5,2464 2084.5,2464 ccw(c2084.5,2470) 2090.5,2470 cw(c2096.5,2470) 2096.5,2476 2097.5,2476 cw(c2097.5,2470) 2103.5,2470 ccw(c2109.5,2470) 2109.5,2464 2110.5,2464 ccw(c2110.5,2470) 2116.5,2470 cw(c2122.5,2470) 2122.5,2476 2123.5,2476 cw(c2123.5,2470) 2129.5,2470 ccw(c2135.5,2470) 2135.5,2464 2136.5,2464 ccw(c2136.5,2470) 2142.5,2470 cw(c2148.5,2470) 2148.5,2476 2149.5,2476 cw(c2149.5,2470) 2155.5,2470 ccw(c2161.5,2470) 2161.5,2464 2162.5,2464 ccw(c2162.5,2470) 2168.5,2470 cw(c2174.5,2470) 2174.5,2476 2175.5,2476 cw(c2175.5,2470) 2181.5,2470 ccw(c2187.5,2470) 2187.5,2464 2188.5,2464 ccw(c2188.5,2470) 2194.5,2470 cw(c2200.5,2470) 2200.5,2476 2201.5,2476 cw(c2201.5,2470) 2207.5,2470 ccw(c2213.5,2470) 2213.5,2464 2214.5,2464 ccw(c2214.5,2470) 2220.5,2470 cw(c2226.5,2470) 2226.5,2476 2227.5,2476 cw(c2227.5,2470) 2233.5,2470 ccw(c2239.5,2470) 2239.5,2464 2240.5,2464 ccw(c2240.5,2470) 2246.5,2470 cw(c2252.5,2470) 2252.5,2476 2253.5,2476 cw(c2253.5,2470) 2259.5,2470 ccw(c2265.5,2470) 2265.5,2464 2266.5,2464 ccw(c2266.5,2470) 2272.5,2470 cw(c2278.5,2470) 2278.5,2476 2279.5,2476 cw(c2279.5,2470) 2285.5,2470 ccw(c2291.5,2470) 2291.5,2464 2292.5,2464 ccw(c2292.5,2470) 2298.5,2470 cw(c2304.5,2470) 2304.5,2476 2305.5,2476 cw(c2305.5,2470) 2311.5,2470 ccw(c2317.5,2470) 2317.5,2464 2318.5,2464 ccw(c2318.5,2470) 2324.5,2470 cw(c2330.5,2470) 2330.5,2476 2331.5,2476 cw(c2331.5,2470) 2337.5,2470 2350.5,2470 2357,2470 2361.9,2465.1 2371.1,2455.9 ccw(c2375.34,2451.66) 2371.1,2447.42 2371.8,2446.71 ccw(c2376.04,2450.96) 2380.29,2446.71 cw(c2384.53,2442.47) 2388.77,2446.71 2389.48,2446.01 cw(c2385.24,2441.76) 2389.48,2437.52 ccw(c2393.72,2433.28) 2389.48,2429.03 2390.19,2428.33 ccw(c2394.43,2432.57) 2398.67,2428.33 cw(c2402.91,2424.09) 2407.16,2428.33 2407.86,2427.62 cw(c2403.62,2423.38) 2407.86,2419.14 ccw(c2412.11,2414.89) 2407.86,2410.65 2408.57,2409.94 ccw(c2412.81,2414.19) 2417.06,2409.94 cw(c2421.3,2405.7) 2425.54,2409.94 2426.25,2409.24 cw(c2422.01,2404.99) 2426.25,2400.75 ccw(c2430.49,2396.51) 2426.25,2392.27 2426.96,2391.56 ccw(c2431.2,2395.8) 2435.44,2391.56 cw(c2439.68,2387.32) 2443.93,2391.56 2444.63,2390.85 cw(c2440.39,2386.61) 2444.63,2382.37 ccw(c2448.88,2378.12) 2444.63,2373.88 2445.34,2373.17 ccw(c2449.58,2377.42) 2453.83,2373.17 cw(c2458.07,2368.93) 2462.31,2373.17 2463.02,2372.47 cw(c2458.78,2368.22) 2463.02,2363.98 ccw(c2467.26,2359.74) 2463.02,2355.5 2463.73,2354.79 ccw(c2467.97,2359.03) 2472.21,2354.79 2481.4,2345.6 2486,2341 2486,2335.5 2486,2322.5 cw(c2486,2316.5) 2492,2316.5 2492,2315.5 cw(c2486,2315.5) 2486,2309.5 ccw(c2486,2303.5) 2480,2303.5 2480,2302.5 ccw(c2486,2302.5) 2486,2296.5 cw(c2486,2290.5) 2492,2290.5 2492,2289.5 cw(c2486,2289.5) 2486,2283.5 ccw(c2486,2277.5) 2480,2277.5 2480,2276.5 ccw(c2486,2276.5) 2486,2270.5 cw(c2486,2264.5) 2492,2264.5 2492,2263.5 cw(c2486,2263.5) 2486,2257.5 ccw(c2486,2251.5) 2480,2251.5 2480,2250.5 ccw(c2486,2250.5) 2486,2244.5 cw(c2486,2238.5) 2492,2238.5 2492,2237.5 cw(c2486,2237.5) 2486,2231.5 ccw(c2486,2225.5) 2480,2225.5 2480,2224.5 ccw(c2486,2224.5) 2486,2218.5 cw(c2486,2212.5) 2492,2212.5 2492,2211.5 cw(c2486,2211.5) 2486,2205.5 ccw(c2486,2199.5) 2480,2199.5 2480,2198.5 ccw(c2486,2198.5) 2486,2192.5 cw(c2486,2186.5) 2492,2186.5 2492,2185.5 cw(c2486,2185.5) 2486,2179.5 ccw(c2486,2173.5) 2480,2173.5 2480,2172.5 ccw(c2486,2172.5) 2486,2166.5 cw(c2486,2160.5) 2492,2160.5 2492,2159.5 cw(c2486,2159.5) 2486,2153.5 ccw(c2486,2147.5) 2480,2147.5 2480,2146.5 ccw(c2486,2146.5) 2486,2140.5 cw(c2486,2134.5) 2492,2134.5 2492,2133.5 cw(c2486,2133.5) 2486,2127.5 ccw(c2486,2121.5) 2480,2121.5 2480,2120.5 ccw(c2486,2120.5) 2486,2114.5 cw(c2486,2108.5) 2492,2108.5 2492,2107.5 cw(c2486,2107.5) 2486,2101.5 ccw(c2486,2095.5) 2480,2095.5 2480,2094.5 ccw(c2486,2094.5) 2486,2088.5 cw(c2486,2082.5) 2492,2082.5 2492,2081.5 cw(c2486,2081.5) 2486,2075.5 ccw(c2486,2069.5) 2480,2069.5 2480,2068.5 ccw(c2486,2068.5) 2486,2062.5 cw(c2486,2056.5) 2492,2056.5 2492,2055.5 cw(c2486,2055.5) 2486,2049.5 ccw(c2486,2043.5) 2480,2043.5 2480,2042.5 ccw(c2486,2042.5) 2486,2036.5 cw(c2486,2030.5) 2492,2030.5 2492,2029.5 cw(c2486,2029.5) 2486,2023.5 ccw(c2486,2017.5) 2480,2017.5 2480,2016.5 ccw(c2486,2016.5) 2486,2010.5 cw(c2486,2004.5) 2492,2004.5 2492,2003.5 cw(c2486,2003.5) 2486,1997.5 ccw(c2486,1991.5) 2480,1991.5 2480,1990.5 ccw(c2486,1990.5) 2486,1984.5 cw(c2486,1978.5) 2492,1978.5 2492,1977.5 cw(c2486,1977.5) 2486,1971.5 ccw(c2486,1965.5) 2480,1965.5 2480,1964.5 ccw(c2486,1964.5) 2486,1958.5 cw(c2486,1952.5) 2492,1952.5 2492,1951.5 cw(c2486,1951.5) 2486,1945.5 ccw(c2486,1939.5) 2480,1939.5 2480,1938.5 ccw(c2486,1938.5) 2486,1932.5 cw(c2486,1926.5) 2492,1926.5 2492,1925.5 cw(c2486,1925.5) 2486,1919.5 ccw(c2486,1913.5) 2480,1913.5 2480,1912.5 ccw(c2486,1912.5) 2486,1906.5 cw(c2486,1900.5) 2492,1900.5 2492,1899.5 cw(c2486,1899.5) 2486,1893.5 ccw(c2486,1887.5) 2480,1887.5 2480,1886.5 ccw(c2486,1886.5) 2486,1880.5 cw(c2486,1874.5) 2492,1874.5 2492,1873.5 cw(c2486,1873.5) 2486,1867.5 ccw(c2486,1861.5) 2480,1861.5 2480,1860.5 ccw(c2486,1860.5) 2486,1854.5 cw(c2486,1848.5) 2492,1848.5 2492,1847.5 cw(c2486,1847.5) 2486,1841.5 ccw(c2486,1835.5) 2480,1835.5 2480,1834.5 ccw(c2486,1834.5) 2486,1828.5 2486,1822 2486,1779 2478.98,1771.98 U2.34@2456.18,1771.98